# Altium PCB pmu.PcbDoc
Units mil, origin at the board's own origin, x right, y up, seen from the top; angles counter-clockwise.
Board outline 1870 x 900 mil, 2 copper layers (Top Layer, Bottom Layer); 15 components, 10 nets, 36 pads, 0 vias.
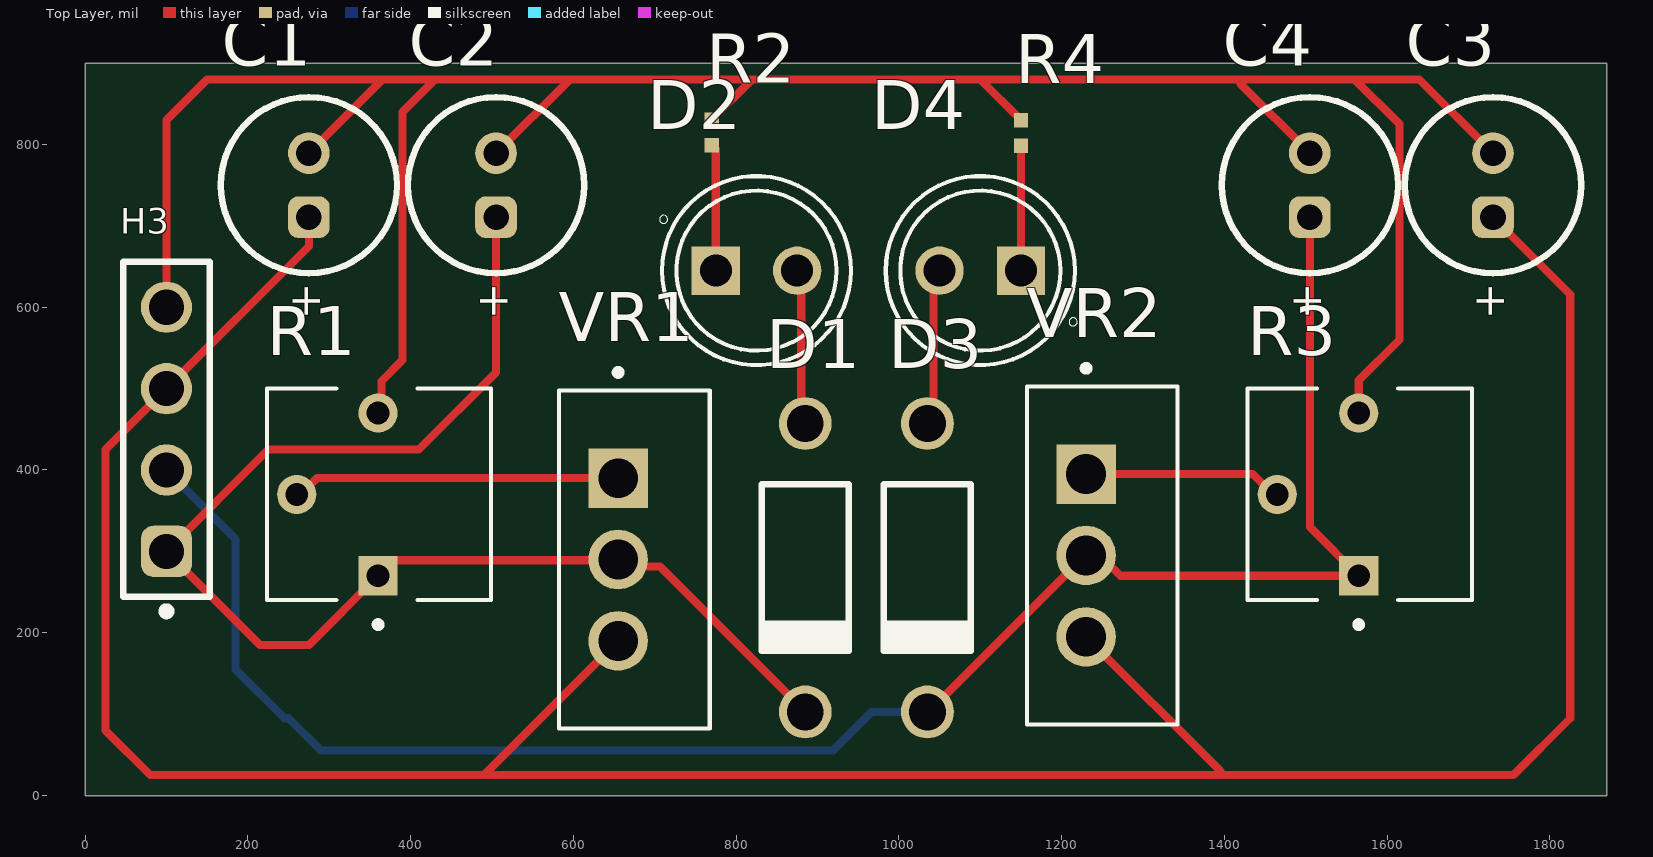
[diagram p0: Top Layer view]
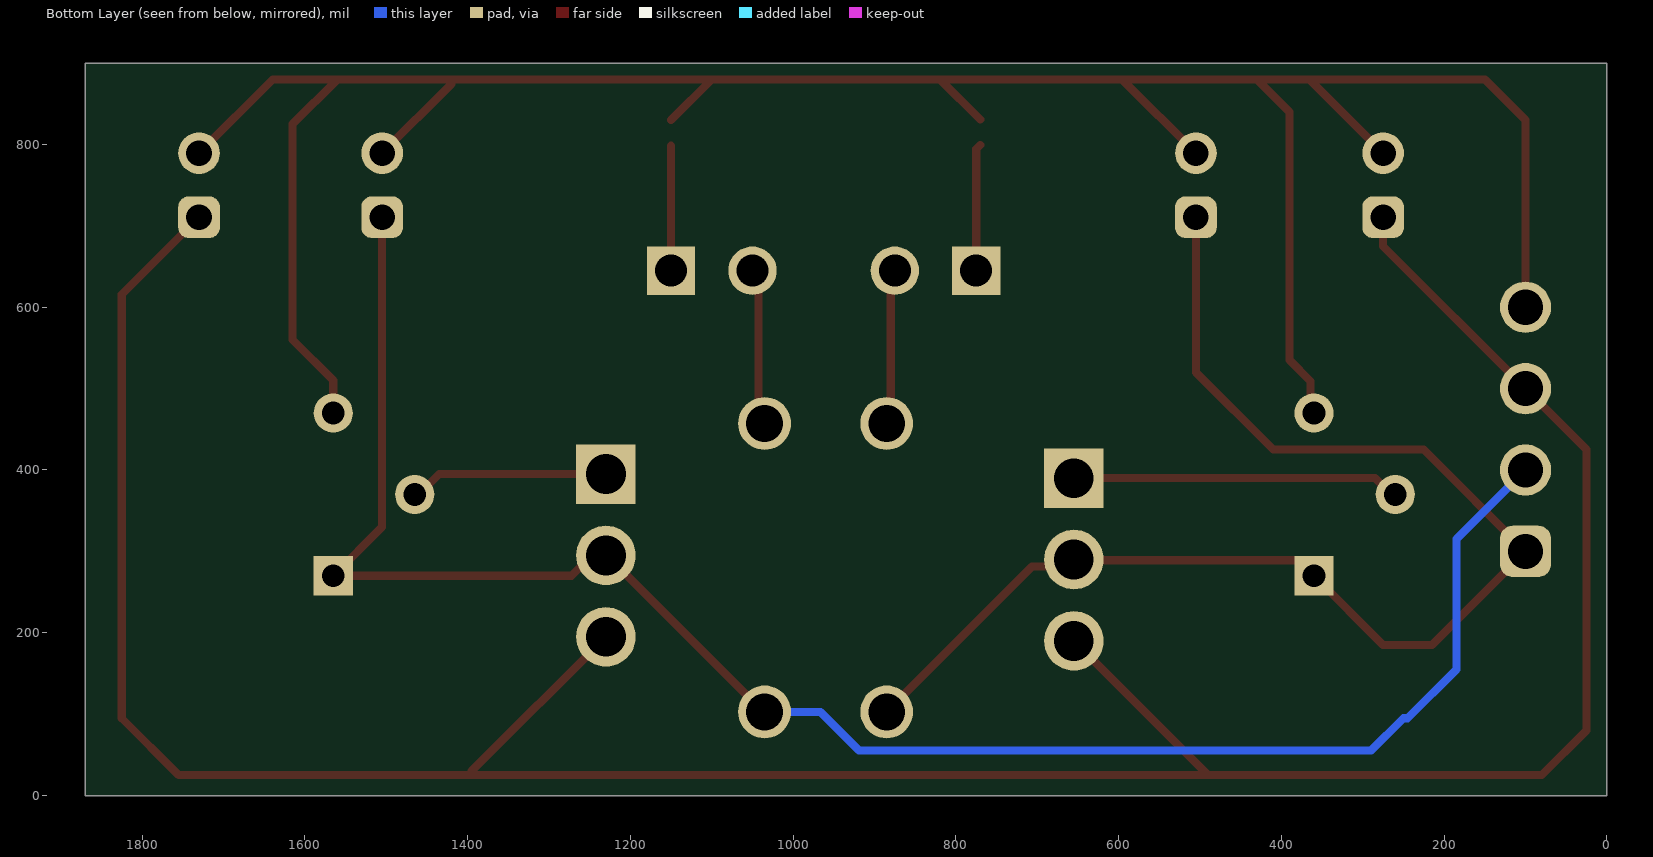
[diagram p1: Bottom Layer view, seen from below]
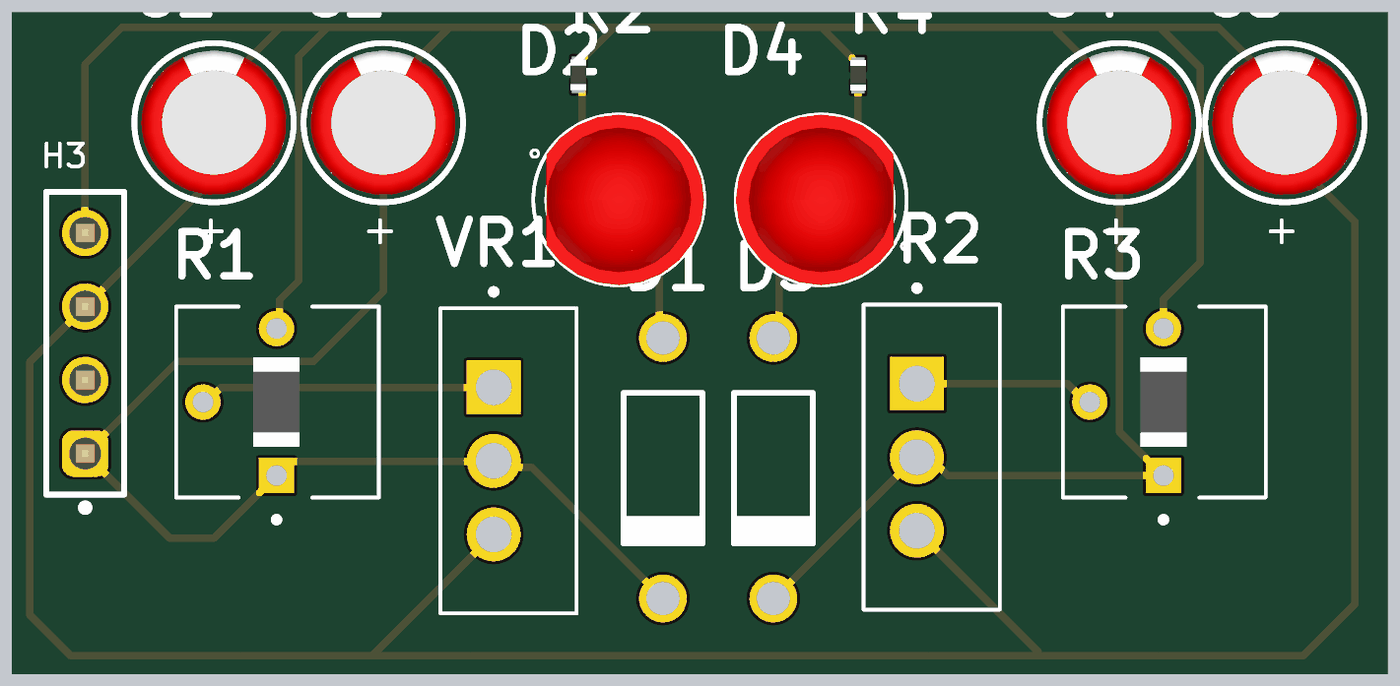
[diagram p2: 3D render of the assembled board from above, using the file's embedded part models]

## Layer stack, top to bottom
Top Solder: solder mask 0.4, Solder Resist, Dk 3.5
Top Layer: signal copper 1.4
Dielectric 1: dielectric 12.6, FR-4, Dk 4.8
Bottom Layer: signal copper 1.4
Bottom Solder: solder mask 0.4, Solder Resist, Dk 3.5

## Board outline
0,0 1870,0 1870,900 0,900

## Design rules (kind name [scope] priority, off if disabled: settings)
Clearance [All] p1: gap=10 ignorepadtopadclearanceinfootprint=FALSE
PolygonConnect [All] p1: connectstyle=Relief reliefconductorwidth=10 reliefentries=4 polygonreliefangle="90 Angle" airgapwidth=10
RoutingVias [All] p1: holewidth=28 width=50 viastyle="Through Hole" minholewidth=28 minwidth=50 maxholewidth=28 maxwidth=50
SolderMaskExpansion [All] p1: expansion=4 istentingtop=FALSE
SupplyNets "Schematic Supply Nets" [InNet('GND')] p1: voltage=0.000
Width [All] p1: maxlimit=10 minlimit=10 preferedwidth=10
30 further rules are at their usual default settings.

## Components (designator, comment, footprint, x,y, rotation, side; value= is the part's Value field where it differs from the comment)
C1 "2.2µF" WCAP-ATG5_D5H11 275,750 r270 top
C2 "1.1uF" WCAP-ATG5_D5H11 505,750 r270 top
C3 "2.2µF" WCAP-ATG5_D5H11 1730,750 r270 top
C4 "1.1uF" WCAP-ATG5_D5H11 1505,750 r270 top
D1 "1N4742A" FAIR-DO-41-2_V 885,280 r270 top
D2 "WP7113ID" LED_WP7113ID 825,645 r0 top
D3 "1N4742A" FAIR-DO-41-2_V 1035,280 r270 top
D4 "WP7113ID" LED_WP7113ID 1100,645 r180 top
H3 "61300411121" 61300411121 100,450 r90 top
R1 "" TRIM_3362P-1-103LF 360,370 r90 top
R2 "ERJ2GE0R00X" RESC1005X40X25LL05T05 770,815 r270 top
R3 "" TRIM_3362P-1-103LF 1565,370 r90 top
R4 "ERJ2GE0R00X" RESC1005X40X25LL05T05 1150,814.25 r270 top
VR1 "LM317AT/NOPB" TO254P1054X470X1955-3 655,290 r270 top
VR2 "LM317AT/NOPB" TO254P1054X470X1955-3 1230,295 r270 top

## Footprints (in the part's own frame and the unit in brackets; to place one, negate y for a bottom-side part, rotate by r counter-clockwise, add the part's x,y. Pads: shape width x height; smd on the part's side, far side on the other; paste and mask are expansions set on the pad)
61300411121 [mm] "Pin Header, pitch 2.54 mm, THT, Vertical, single row, 4p"
  rrect50% 1.6x1.6 hole 1.1: 1(-3.81,0)
  round 1.6 hole 1.1: 2(-1.27,0) 3(1.27,0) 4(3.81,0)
  silkscreen extent -5.8,-1.35 5.23,1.35, body extent -5.08,-1.27 5.08,1.27, height 8.57
FAIR-DO-41-2_V [mm] "2-Leads, Axial leaded, Body 2.72x5.2mm, Pin Spacing 9mm"
  round 1.65 hole 1.15: 1(-4.5,0) 2(4.5,0)
  silkscreen extent -2.6,-1.36 2.6,1.36, body extent -4.93,-1.36 4.93,1.36, height 2.71
LED_WP7113ID [mm]
  round 1.508 hole 1: A(1.27,0)
  rect 1.508x1.508 / inner round 1.508 / far side rect 1.508x1.508 hole 1: C(-1.27,0)
  silkscreen extent -3.03,-2.95 2.95,2.95, body extent -2.5,-2.95 2.95,2.95, height 9.6
RESC1005X40X25LL05T05 [mm] "Chip Resistor, 2-Leads, Body 1.05x0.55mm, IPC High Density"
  rect 0.45x0.45 smd: 1(-0.4,0) 2(0.4,0)
  body extent -0.53,-0.28 0.53,0.28, height 0.4
TO254P1054X470X1955-3 [mm]
  rect 1.86x1.86 hole 1.24: 1(-2.54,0)
  round 1.86 hole 1.24: 2(0,0) 3(2.54,0)
  silkscreen extent -5.94,-1.84 5.27,2.86
TRIM_3362P-1-103LF [mil]
  rect 48.11x48.11 hole 28.11: 1(-100,0)
  round 48.11 hole 28.11: 2(0,100) 3(100,0)
  silkscreen extent -164,-139 130,137, body extent -61,-31 61,31, height 26
WCAP-ATG5_D5H11 [mm] "Aluminum Electrolytic Capacitors, 5x11mm"
  rrect50% 1.3x1.3 hole 0.8: 1(1,0)
  round 1.3 hole 0.8: 2(-1,0)
  silkscreen extent -2.75,-2.75 2.75,2.75, body extent -2.49,-2.5 2.5,2.5, height 11.31

## Part data
C1 C3: library part 860020672006, "WCAP-ATG5 Aluminum Electrolytic Capacitor, Radial, THT, D5 x H11mm, 2.2µF, 50V", Capacitance Tolerance=+/-20%, Leakage Current=3µA, Manufacturer="Wurth Elektronik", Operating Temperature Max=105°C, Operating Temperature Min=-40°C, Rated Voltage (DC)=50V, Ripple Current=20mA, Capacitance=2.2µF, Category="Aluminum Electrolytic Capacitors", ComponentLink1Description="Website Link", ComponentLink1URL=https://www.we-online.com/redexpert/article/860020672006?ad, ComponentLink2Description="Datasheet Link", ComponentLink2URL=https://www.we-online.com/redexpert/spec/860020672006?ad, Diameter=5mm, Dissipation Factor=10%, Endurance=2000h, Height=11mm, Manufacturer Part Number=860020672006, Match Code=WCAP-ATG5, Mount="Through Hole", Packaging="Ammo Pack", Technical Reference=ATDC1102R2M050DSPA3B000
C2 C4: library part 860020672006, "WCAP-ATG5 Aluminum Electrolytic Capacitor, Radial, THT, D5 x H11mm, 2.2µF, 50V", Capacitance=2.2µF, Capacitance Tolerance=+/-20%, Leakage Current=3µA, Manufacturer="Wurth Elektronik", Operating Temperature Max=105°C, Operating Temperature Min=-40°C, Rated Voltage (DC)=50V, Ripple Current=20mA, Category="Aluminum Electrolytic Capacitors", ComponentLink1Description="Website Link", ComponentLink1URL=https://www.we-online.com/redexpert/article/860020672006?ad, ComponentLink2Description="Datasheet Link", ComponentLink2URL=https://www.we-online.com/redexpert/spec/860020672006?ad, Diameter=5mm, Dissipation Factor=10%, Endurance=2000h, Height=11mm, Manufacturer Part Number=860020672006, Match Code=WCAP-ATG5, Mount="Through Hole", Packaging="Ammo Pack", Technical Reference=ATDC1102R2M050DSPA3B000
D1 D3: library part CMP-0892-00001-1, "Zener Diode, 12V, 1W, 5%, -65 to 200 degC, 2-Pin DO-41, Body 2.72 x 5.2 mm, RoHS", Manufacturer="Fairchild Semiconductor", Operating and Storage Temperature Range="-65 to 200 degC", Test Current IZ (mA)=21, Tolerance=5%, ComponentLink1Description="Manufacturer URL", ComponentLink1URL=http://www.fairchildsemi.com/, ComponentLink2Description=Datasheet, ComponentLink2URL=http://www.fairchildsemi.com/ds/1N/1N4744A.pdf, ComponentLink3Description="Package Specification", ComponentLink3URL=http://www.fairchildsemi.com/dwg/DO/DO41A.pdf, DatasheetVersion="Rev. H3", IR (uA)=5, Mounting Technology="Through Hole", PackageDescription="2-Pin Axial leaded, Body 2.72 x 5.2 mm, Lead Spread 25.4 mm", PackageReference=DO-41-2, PackageVersion="Rev. 2", PartNumber=1N4742A, PD (W)=1, RoHS=TRUE, VZ (Max.) (V)=12.6, VZ (Min.) (V)=11.4, ZZ (Max) (ohm)=8
D2 D4: "Red 617nm LED Indication - Discrete 2V Radial", Package="Radial Kingbright", Availability="In Stock", Check_prices=https://www.snapeda.com/parts/WP7113ID/Kingbright/view-part/?ref=eda, MF=Kingbright, MP=WP7113ID, Price=None, Purchase-URL=https://pricing.snapeda.com/search/part/WP7113ID/?ref=eda, SnapEDA_Link=https://www.snapeda.com/parts/WP7113ID/Kingbright/view-part/?ref=snap
H3: "WR-PHD Pin Header, THT, Vertical, pitch 2.54mm, 1 Row, 4P", Contact Resistance=20mOhm, Manufacturer="Wurth Elektronik", Operating Temperature Max=105°C, Operating Temperature Min=-40°C, Rated Current=3A, Withstanding Voltage=500V, Working Voltage=250V, Category="Board-to-Board Connectors", ComponentLink1Description="Website Link", ComponentLink1URL=https://www.we-online.com/redexpert/article/61300411121?ad, ComponentLink2Description="Datasheet Link", ComponentLink2URL=https://www.we-online.com/redexpert/spec/61300411121?ad, Gender="Pin Header", Manufacturer Part Number=61300411121, Match Code=WR-PHD, Mount="Through Hole", Number of Pins=4, Number of Rows=1, Orientation=Vertical, Packaging=Bag, Pitch=2.54mm
R1 R3: "10 kOhms 0.5W, 1/2W PC Pins Through Hole Trimmer Potentiometer Cermet 1 Turn Top Adjustment", Package="3116 Bourns", Check_prices=https://www.snapeda.com/parts/3362P-1-103LF/Bourns/view-part/13764/?ref=eda, Digi-Key_Part_Number=3362P-103LF-ND, MF=Bourns, MP=3362P-1-103LF, Purchase-URL=https://pricing.snapeda.com/search/part/3362P-1-103LF/?ref=eda, SnapEDA_Link=https://www.snapeda.com/parts/3362P-1-103LF/Bourns/view-part/13764/?ref=snap
R2 R4: library part CMP-2000-07451-1, "Chip Resistor, 0 Ohm, 0.1 W, -55 to 155 degC, 0402 (1005 Metric), RoHS, Tape and Reel", Case Code (Imperial)=0402, Case Code (Metric)=1005, Manufacturer=Panasonic, Max Operating Temperature=155degC, Max Power Dissipation=100mW, Min Operating Temperature=-55degC, Package Description="2-Pin Surface Mount Device, Body 1 x 0.5 mm", Package Quantity=1, Package Reference=402, Resistance=0mOhm, Temperature Coefficient=600ppm/��C, Tolerance=5%, Voltage Rating=50V, Case/Package=0402, Composition=ThickFilm, Contact Plating=Tin, Datasheet URL=https://industrial.panasonic.com/cdbs/www-data/pdf/RDA0000/AOA0000C301.pdf, Datasheet Version=03/2015, Depth=0.5mm, Height=0.35mm, Lead Free=LeadFree, Length=1mm, Manufacturer URL=http://www.panasonic.com/, Military Standard=Not, Mount=SurfaceMount, Mounting Technology=SurfaceMount, Number of Terminations=2, Packaging=TapeandReel, Power Rating=100mW, Radiation Hardening=No, REACH SVHC=NoSVHC, RoHSCompliant=True, Termination=SMD/SMT, Voltage Rating (DC)=50V, Width=0.02inch
VR1 VR2: Package=None, Availability=Unavailable, MP=LM317AT/NOPB, Price=None

## Nets (pads, with @x,y where several pads share a name; then routed paths per layer and width w, separated by ;. In a path a pad name is that pad's centre, name@x,y a point inside that pad or via, vN(x,y) a via of type N, cw(c..) or ccw(c..) an arc to the next point about the centre after c; other vN are vias at no path point)
+5V: C2.1 D1.2 H3.1 R1.1 VR1.2 | length 1640.4
  Top Layer w10: C2.1 505,520 410,425 225,425 H3.1 215,185 275,185 R1.1 379.06,289.06 654.06,289.06 VR1.2 663.78,281.22 706.61,281.22 D1.2
+7V: C4.1 D3.2 H3.2 R3.1 VR2.2 | length 2290.7
  Top Layer w10: H3.2 H3.2@110,410 ; D3.2 1036.42,102.83 1228.58,295 VR2.2 1247.11,295 1272.11,270 R3.1 1505,330 C4.1
  Bottom Layer w10: H3.2 185,315 185,155 245,95 250,95 289.65,55.35 918.99,55.35 966.47,102.83 D3.2
+12V: C1.1 C3.1 H3.3 VR1.3 VR2.3 | length 3712.6
  Top Layer w10: C1.1 275,675 H3.3 25,425 25,80 80,25 490,25 ; VR1.3 490,25 ; VR2.3 1395,30 1395,25 ; C3.1 1825,615.63 1825,95 1755,25 1395,25 ; 490,25 1395,25
GND: C1.2 C2.2 C3.2 C4.2 H3.4 R1.3 R2.1 R3.3 R4.1 | length 3332.8
  Top Layer w10: H3.4 100,830 150,880 365,880 ; C1.2 365,879.37 365,880 ; R1.3 364.06,474.06 364.06,509.06 390,535 390,840 430,880 ; C2.2 595,879.37 595,880 ; R2.1 819.25,880 ; R4.1 1100,880 ; C4.2 1420,874.37 1420,880 ; R3.3 1565,510 1615,560 1615,825 1560,880 ; C3.2 1639.37,880 1560,880 ; 365,880 430,880 ; 430,880 595,880 ; 595,880 819.25,880 ; 819.25,880 1100,880 ; 1100,880 1420,880 ; 1420,880 1560,880
NetD1_1: D1.1 D2.A | length 192
  Top Layer w10: D2.A 880,640 880,462.17 D1.1
NetD2_C: D2.C R2.2 | length 156.3
  Top Layer w10: R2.2 775,794.25 D2.C
NetD3_1: D3.1 D4.A | length 194
  Top Layer w10: D3.1 1042.5,464.67 1042.5,637.5 D4.A
NetD4_C: D4.C R4.2 | length 153.5
  Top Layer w10: D4.C R4.2
NetR1_2: R1.2 VR1.1 | length 403.3
  Top Layer w10: R1.2 264.91,370 284.91,390 VR1.1
NetR3_2: R3.2 VR2.1 | length 245.4
  Top Layer w10: VR2.1 1434.77,395 1459.77,370 R3.2

## Silkscreen, mask and mechanical layers (free items; w line width, h text height)
Mechanical 1:
  the board outline again, w10

## Text inside footprints (layer, text, board x,y; h text height)
C1: Top Overlay "+" at 255.32,629.92 h39.37 r270
C2: Top Overlay "+" at 485.32,629.92 h39.37 r270
C3: Top Overlay "+" at 1710.32,629.92 h39.37 r270
C4: Top Overlay "+" at 1485.32,629.92 h39.37 r270